# Altium PCB HeatMapNodeV1.PcbDoc
Units mil, origin at the board's own origin, x right, y up, seen from the top; angles counter-clockwise.
Board outline 1650 x 1800 mil, 4 copper layers (Top Layer, Internal Layer 1, Internal Layer 2, Bottom Layer), stack 30.668 mil thick; 33 components, 30 nets, 122 pads, 25 vias.
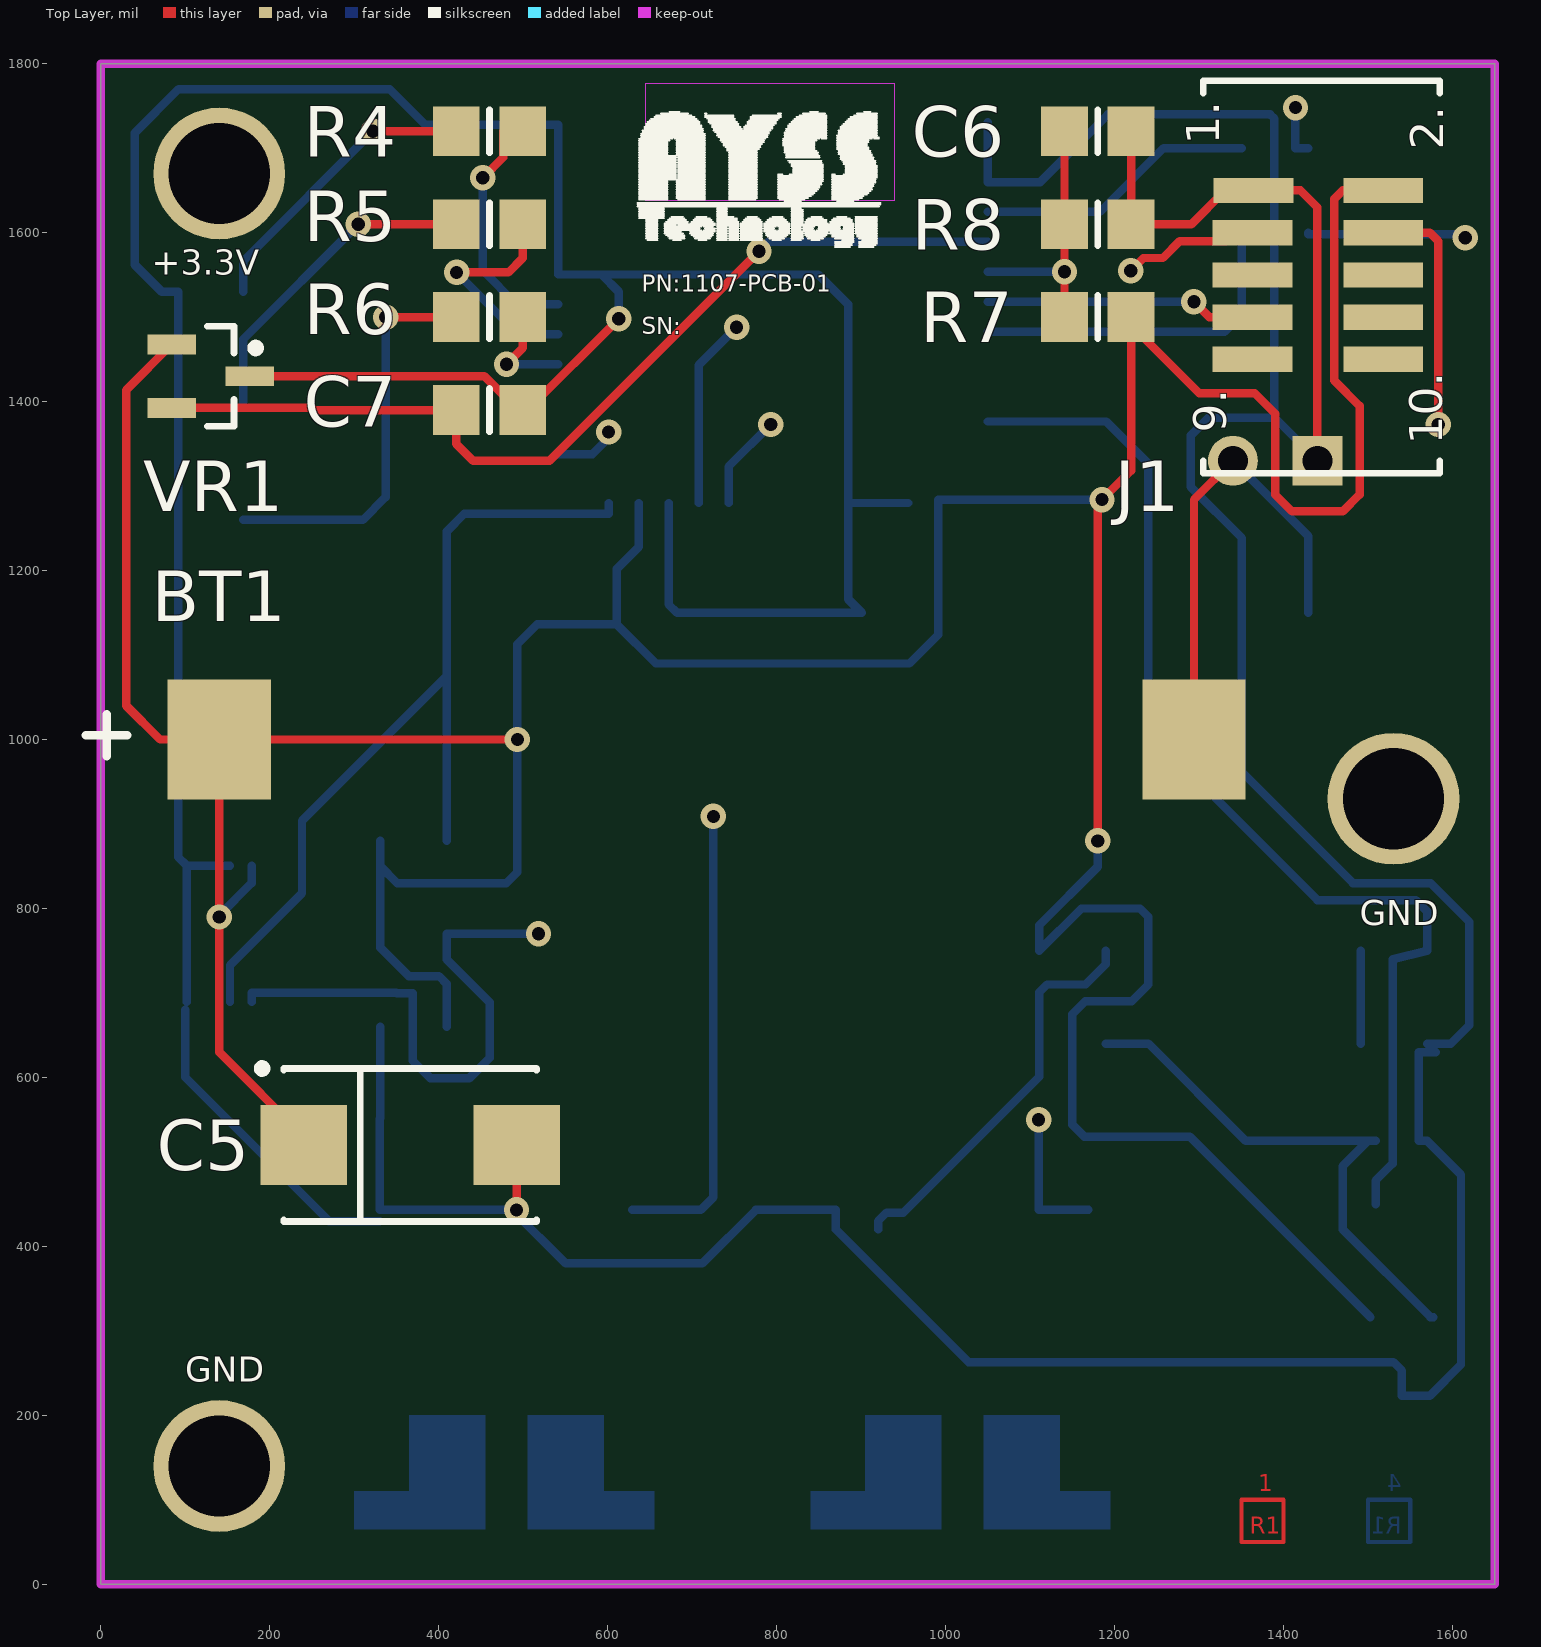
[diagram p0: Top Layer view]
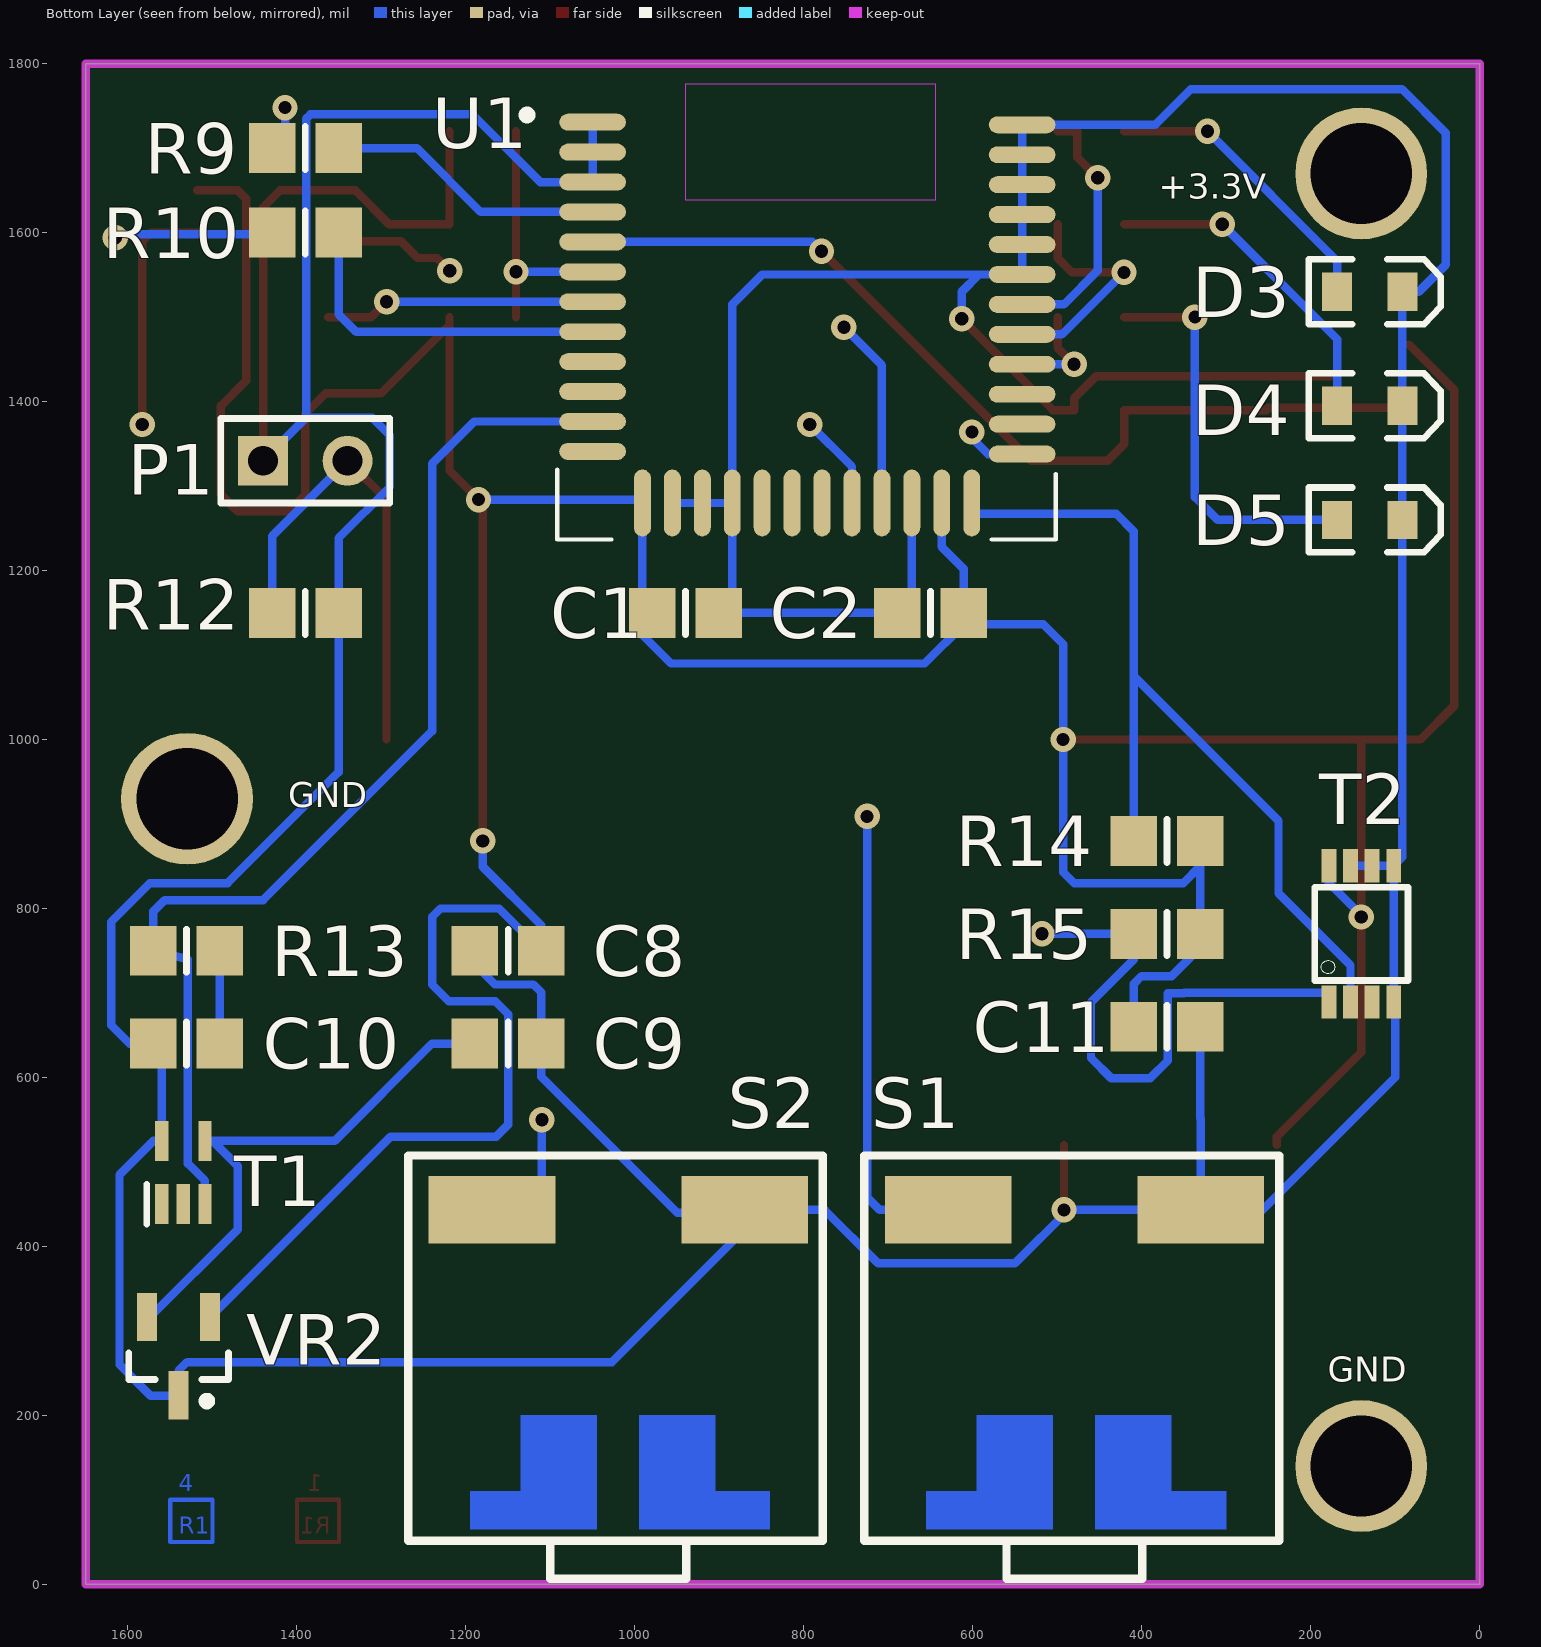
[diagram p1: Bottom Layer view, seen from below]
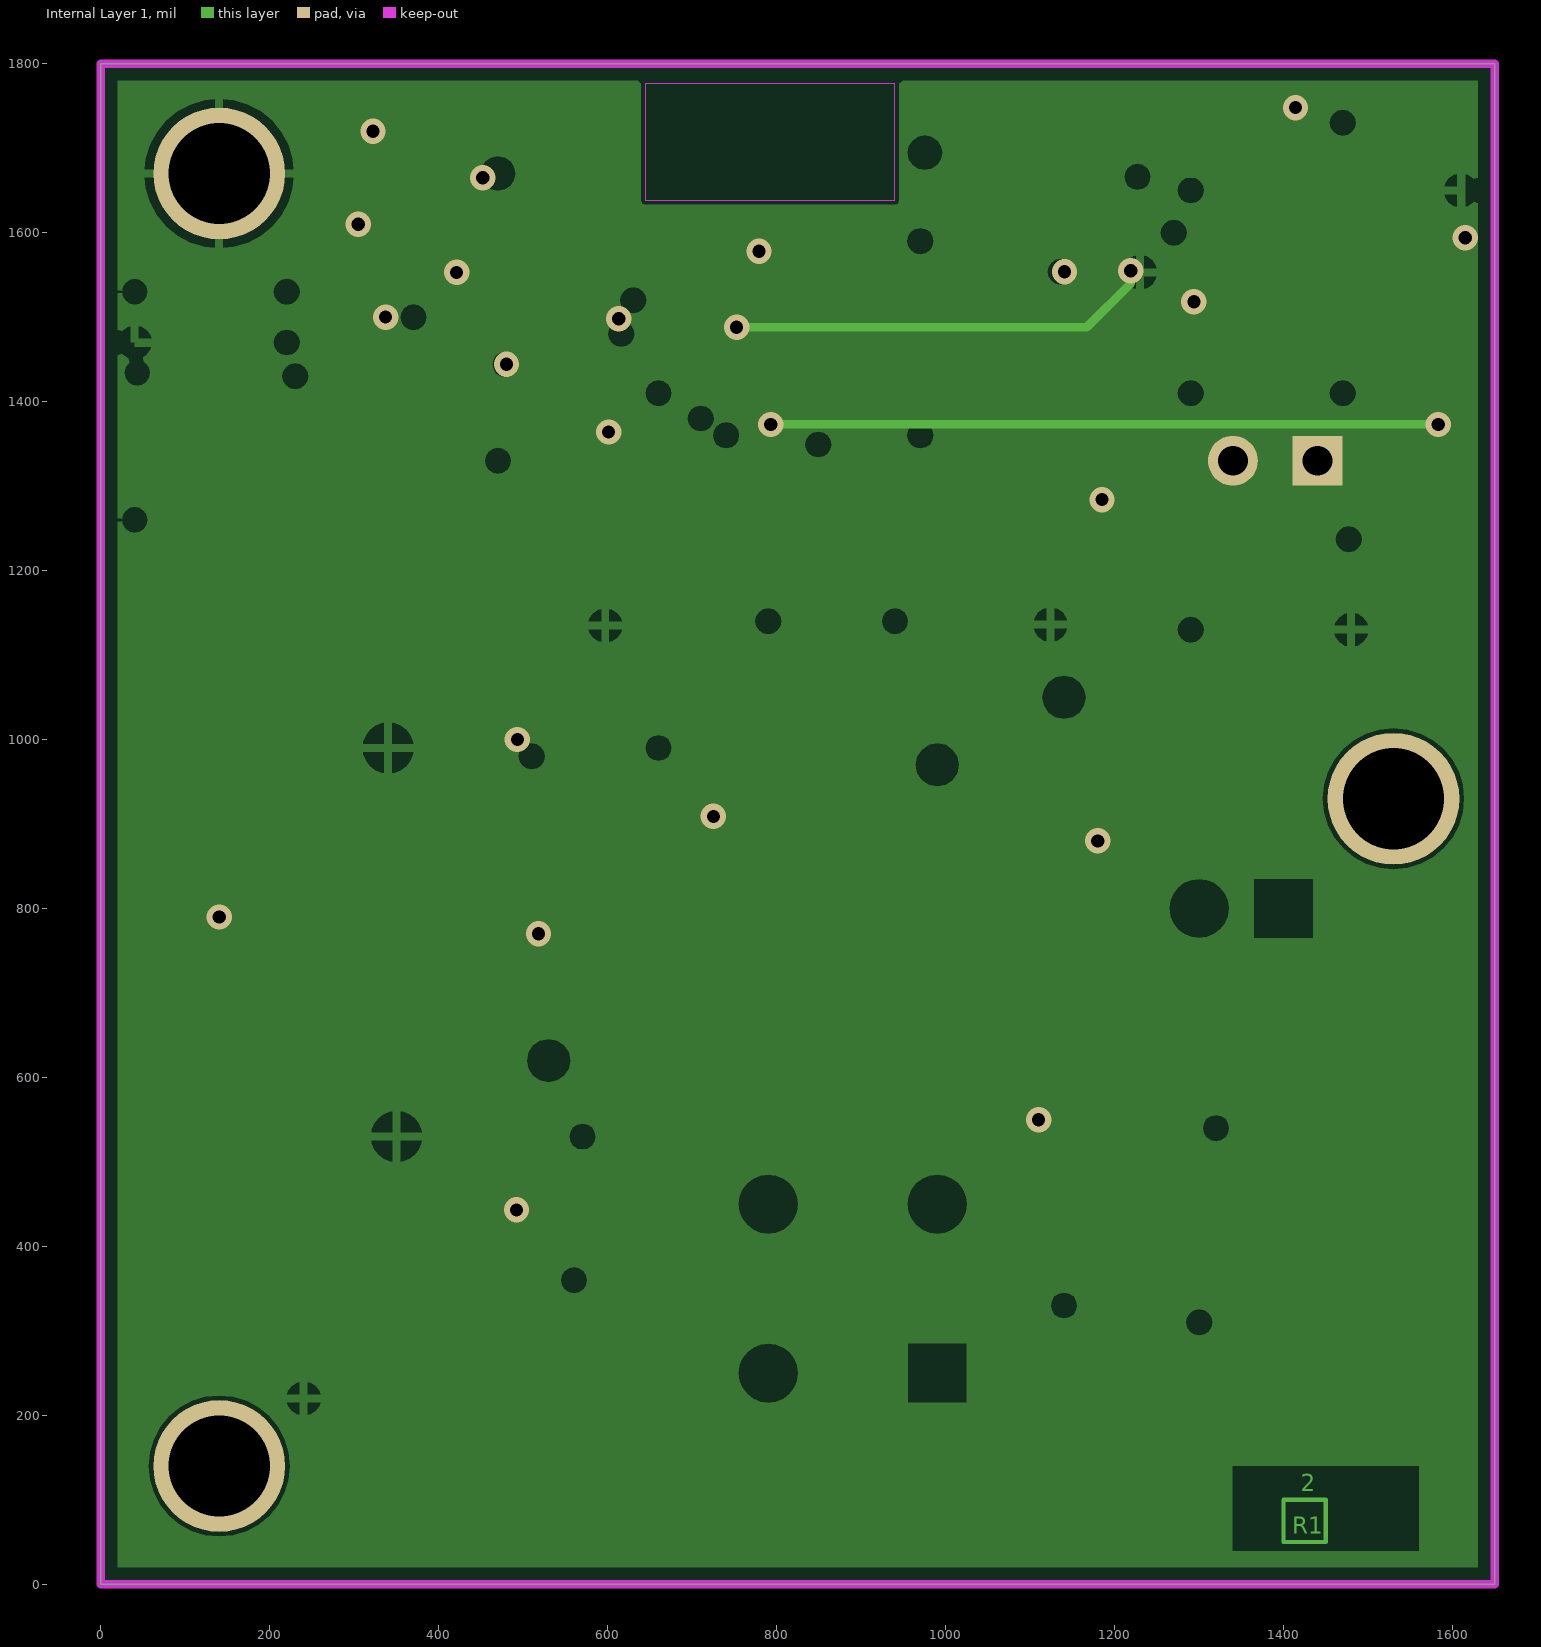
[diagram p2: Internal Layer 1]
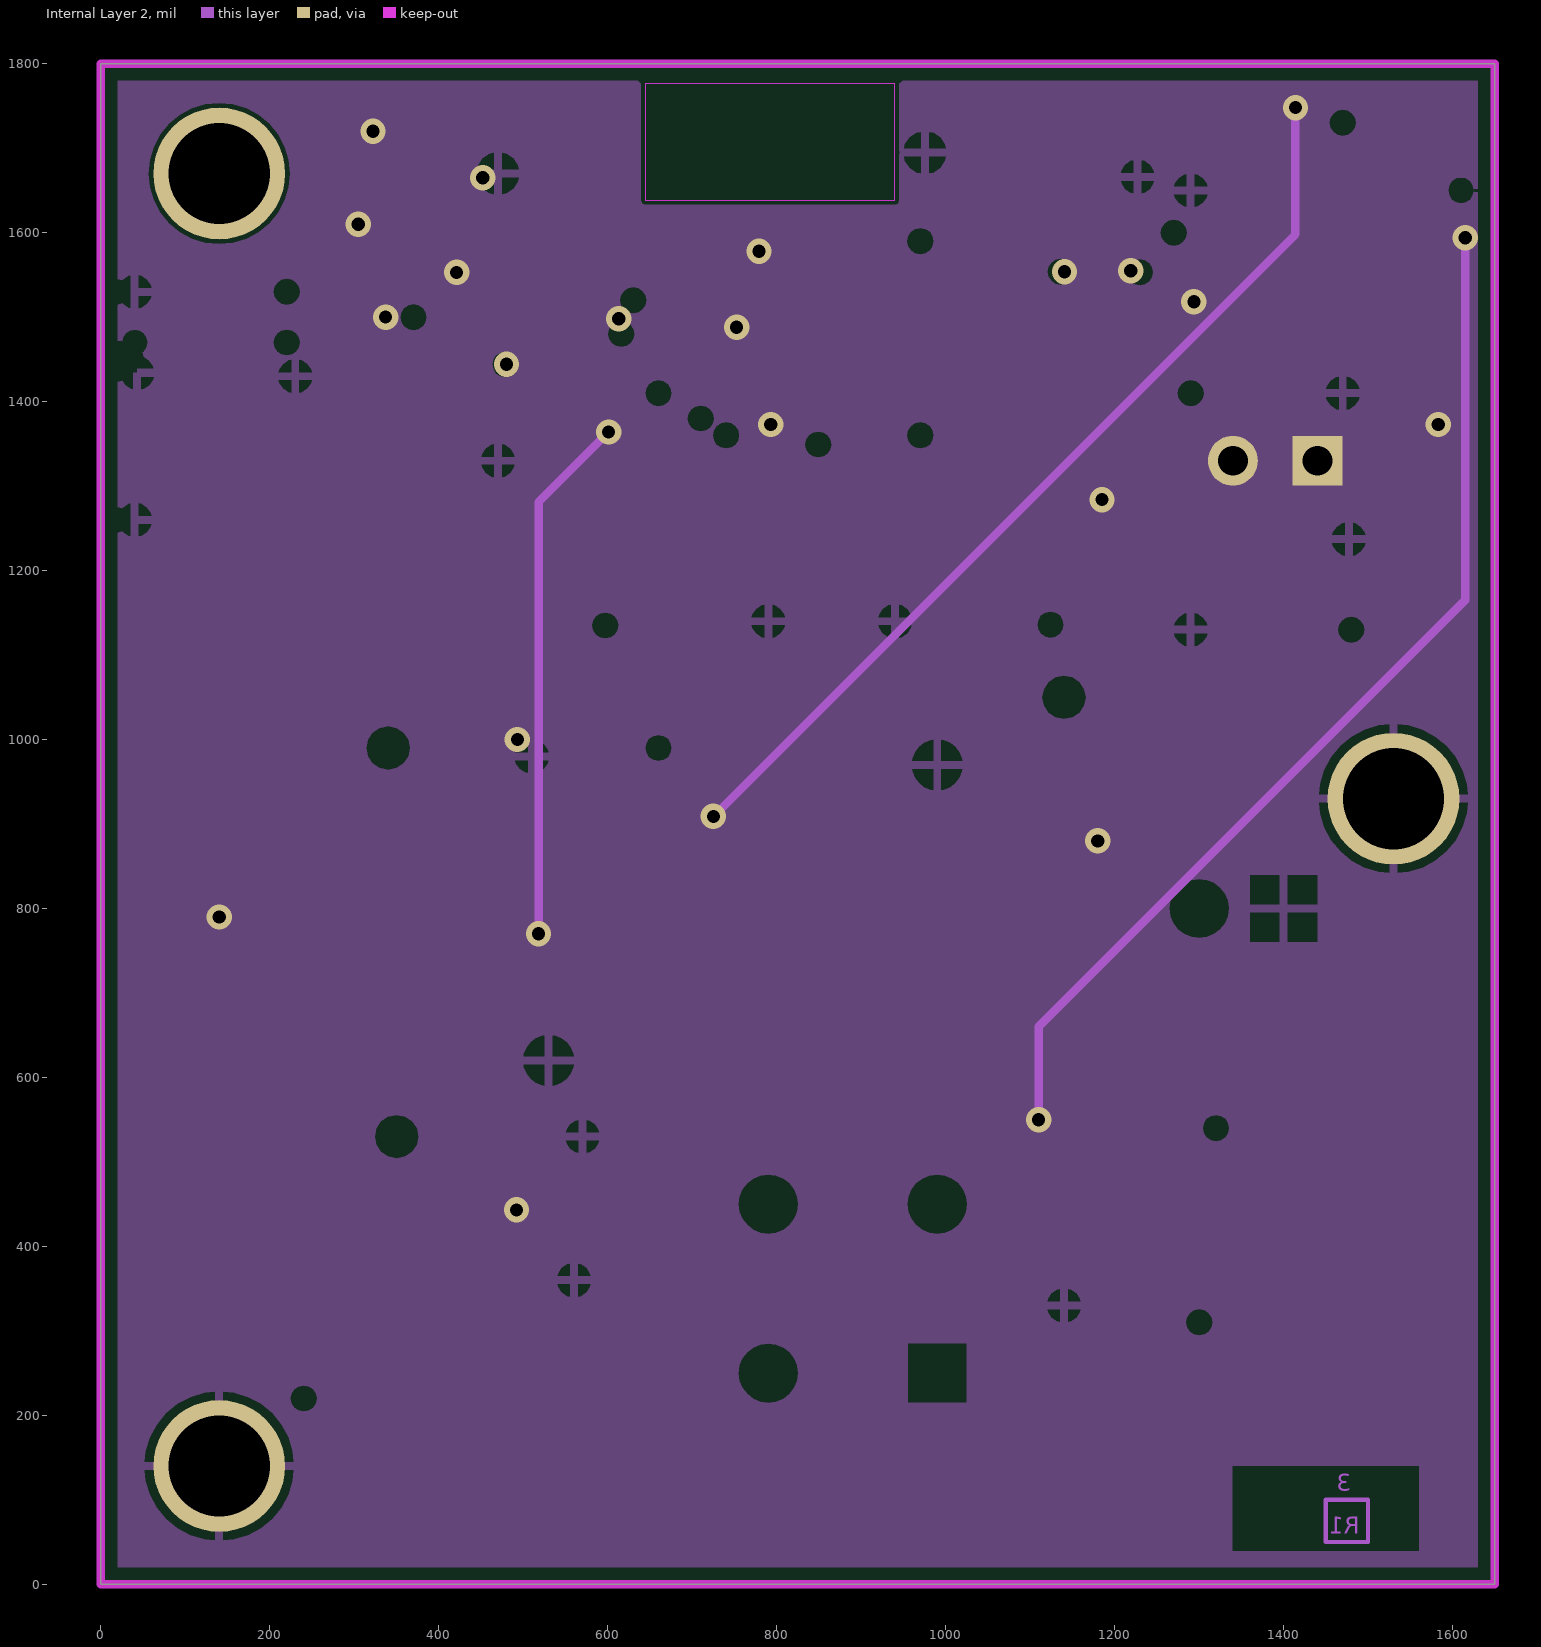
[diagram p3: Internal Layer 2]

## Layer stack, top to bottom
Top Solder: solder mask 0.4, Solder Resist, Dk 3.5
Top Layer: signal copper 1.417
Dielectric 1: core 10, FR-4, Dk 4.2
Internal Layer 1: signal copper 1.417
Dielectric 5: prepreg 5, Dk 4.2
Internal Layer 2: signal copper 1.417
Dielectric 4: core 10, Dk 4.2
Bottom Layer: signal copper 1.417
Bottom Solder: solder mask 0.4, Solder Resist, Dk 3.5

## Board outline
0,0 0,1800 1650,1800 1650,0

## Design rules (kind name [scope] priority, off if disabled: settings)
AssemblyTestPointUsage [(InNet('GND') OR InNet('VDD'))] p1 off: allowmultiple=TRUE
AssemblyTestpoint [All] p1 off: testpointundercomponent=TRUE minsize=40 maxsize=250 preferedsize=60 minholesize=0 maxholesize=150 preferedholesize=32 testpointgrid=1 usegrid=TRUE gridtolerance=0.01 allowsidetop=TRUE allowsidebottom=TRUE
Clearance [All] p1: gap=5 ignorepadtopadclearanceinfootprint=FALSE except(0: Arc-Hole Track-Hole SMDPad-Hole THPad-Hole Via-Hole Fill-Hole Poly-Hole Region-Hole Text-Hole)
DiffPairsRouting [All] p1: maxlimit=15 minlimit=5 mostfreqgap=10 toplayer_minwidth=5 toplayer_maxwidth=15 toplayer_prefwidth=10 midlayer1_minwidth=5 midlayer1_maxwidth=15 midlayer1_prefwidth=10 midlayer2_minwidth=5 midlayer2_maxwidth=15 midlayer2_prefwidth=10 bottomlayer_minwidth=5 bottomlayer_maxwidth=15 bottomlayer_prefwidth=10 maxuncoupledlength=500
FabricationTestPointUsage [(InNet('GND') OR InNet('VDD'))] p1: valid=0 allowmultiple=TRUE
FabricationTestpoint [All] p1: side=3 testpointundercomponent=TRUE minsize=40 maxsize=250 preferedsize=100 minholesize=0 maxholesize=250 preferedholesize=32 testpointgrid=1 allowsidetop=TRUE allowsidebottom=TRUE usegrid=TRUE gridtolerance=0.01
HoleSize [All] p1: absolutevalues=TRUE maxlimit=1000 minlimit=10 maxpercent=80.000 minpercent=20.000
MinimumSolderMaskSliver [All] p1: minsoldermaskwidth=5
PolygonConnect [All] p1: connectstyle=Relief reliefconductorwidth=10 reliefentries=4 polygonreliefangle="90 Angle" airgapwidth=10
RoomDefinition HeatMapNodeV1 [InComponentClass('HeatMapNodeV1')] p1: confinementstyle=ConfineIn formatcopy=TRUE lockcomponents=FALSE outline 1690,60 3670,60 3670,380 1690,380
RoutingVias [All] p1: holewidth=15.6 width=30 viastyle="Through Hole" minholewidth=10 minwidth=20 maxholewidth=31.3 maxwidth=50
SilkToSolderMaskClearance [IsPad] p1: minsilkscreentomaskgap=5 clearancetoexposedcopper=TRUE
SolderMaskExpansion "Via solder mask" [IsVia] p1: expansion=-100 // Solder mask for the vias
SolderMaskExpansion [All] p2: expansion=4
Width [All] p1: maxlimit=20 minlimit=5 preferedwidth=10
22 further rules are at their usual default settings.

## Components (designator, comment, footprint, x,y, rotation, side; value= is the part's Value field where it differs from the comment)
BT1 "1060" 1060 716.97,1000 r180 top
C1 "Cap Semi" 6-0805_M 940,1150 r0 bottom value=0.10µF
C2 "Cap Semi" 6-0805_M 650,1150 r180 bottom value=0.10µF
C5 "Cap Pol3" D 365.98,520 r0 top value=100µF
C6 "Cap Semi" 6-0805_M 1180,1720 r180 top value=0.10µF
C7 "Cap Semi" 6-0805_M 460,1390 r180 top value=0.10µF
C8 "Cap Semi" 6-0805_M 1150,750 r180 bottom value=0.10µF
C9 "Cap Semi" 6-0805_M 1150,640 r0 bottom value=0.10µF
C10 "Cap Semi" 6-0805_M 1530.63,640 r180 bottom value=1µF
C11 "Cap Semi" 6-0805_M 370,660 r0 bottom value=0.01µF
D3 "LED2" 2.0X1.25X1.2 130,1530 r180 bottom
D4 "LED2" 2.0X1.25X1.2 130,1395 r180 bottom
D5 "LED2" 2.0X1.25X1.2 130,1260 r180 bottom
J1 "Header 5X2" HDR2X5_SMD_127 1440,1550 r90 top
P1 "Header 2" HDR1X2 1440,1330 r180 bottom
R4 "Res1" 6-0805_M 460,1720 r180 top value=680
R5 "Res1" 6-0805_M 460,1610 r180 top value=680
R6 "Res1" 6-0805_M 460,1500 r180 top value=680
R7 "Res1" 6-0805_M 1180,1500 r0 top value=10K
R8 "Res1" 6-0805_M 1180,1610 r180 top value=10K
R9 "Res1" 6-0805_M 1390,1700 r0 bottom value=680
R10 "Res1" 6-0805_M 1390,1600 r0 bottom value=680
R12 "Res1" 6-0805_M 1390,1150 r180 bottom value=1k
R13 "Res1" 6-0805_M 1530.63,750 r180 bottom value=200
R14 "Res1" 6-0805_M 370,880 r0 bottom value=10K
R15 "Res1" 6-0805_M 370,770 r0 bottom value=10K
S1 "SW-PB" SA2 480,270 r0 bottom
S2 "SW-PB" SA2 1020,270 r0 bottom
T1 "STLM20W87F" SOT65P210X110-5N 1534.41,487.4 r90 bottom
T2 "TMP75" MSOP8 140,770 r180 bottom
U1 "BLE121LR module" BLE121LR 1050,1280 r180 bottom
VR1 "Volt Reg" SOT23_M 130,1430 r0 top
VR2 "Volt Reg" SOT23_M 1540,270 r270 bottom

## Footprints (in the part's own frame and the unit in brackets; to place one, negate y for a bottom-side part, rotate by r counter-clockwise, add the part's x,y. Pads: shape width x height; smd on the part's side, far side on the other; paste and mask are expansions set on the pad)
2.0X1.25X1.2 [mm] "SM LED; 2 Flat Leads"
  rect 0.9x1.15 smd: 1(-0.98,0) 2(0.98,0)
  silkscreen extent -1.83,-0.97 2.13,0.98
6-0805_M [mm] "Chip Resistor, Body 2.0x1.2mm, IPC Low Density"
  rect 1.4x1.5 smd: 1(-1,0) 2(1,0)
  silkscreen extent 0,-0.65 0,0.65, body extent -1.07,-0.7 1.07,0.7, height 0.7
1060 [mm] "SMT HOLDER FOR 2032 CELL T&R"
  rect 3.108x3.61 smd: 1(-14.655,0) 2(14.655,0)
  silkscreen extent 17.42,-0.76 18.67,0.51, body extent -15.91,-8.06 15.92,7.94, height 6.02
BLE121LR [mil]
  oval 79x20 smd: 1(0,450.79) 2(0,415.35) 3(0,379.92) 4(0,344.49) 5(0,309.05) 6(0,273.62) 7(0,238.19) 8(0,202.76) 9(0,167.32) 10(0,131.89) 11(0,96.46) 12(0,61.02) 25(508.44,57.89) 26(508.44,93.33) 27(508.44,128.76) 28(508.44,164.19) 29(508.44,199.63) 30(508.44,235.06) 31(508.44,270.49) 32(508.44,305.92) 33(508.44,341.36) 34(508.44,376.79) 35(508.44,412.22) 36(508.44,447.66)
  oval 20x79 smd: 13(59.06,0) 14(94.49,0) 15(129.92,0) 16(165.35,0) 17(200.79,0) 18(236.22,0) 19(271.65,0) 20(307.09,0) 21(342.52,0) 22(377.95,0) 23(413.39,0) 24(448.82,0)
  Multi-Layer keep-out region: 110.24,496.06 405.51,496.06 405.51,358.26 110.24,358.26
  silkscreen extent -83,-43 548,464, body extent -30,-31 539,500, height 71
D [mm] "Capacitor, SM Tantalum; Body 7.3 x 4.3 mm (LxW typ)"
  rect 2.6x2.4 smd: 1(-3.2,0) 2(3.2,0)
  silkscreen extent -4.57,-2.3 3.8,2.42
HDR1X2 [mm] "Connector; Header; 2 Position"
  rect 1.5x1.5 hole 0.9: 1(0,0)
  round 1.5 hole 0.9: 2(2.54,0)
  silkscreen extent -1.27,-1.27 3.81,1.27
HDR2X5_SMD_127 [mm] "10 Positions Header, Shrouded Connector 0.050\" (1.27mm) Surface Mount Gold"
  rect 0.76x2.4 smd: 1(2.54,1.919) 2(2.54,-1.981) 3(1.27,1.956) 4(1.27,-1.981) 5(0,1.956) 6(0,-1.981) 7(-1.27,1.956) 8(-1.27,-1.981) 9(-2.54,1.956) 10(-2.54,-1.981)
  silkscreen extent -5.97,-3.68 5.84,3.43, body extent -5.46,-2.41 5.44,2.54, height 5.4
MSOP8 [mm]
  rect 0.45x1 smd: 1(-0.975,-2.05) 2(-0.325,-2.05) 3(0.325,-2.05) 4(0.975,-2.05) 5(0.975,2.05) 6(0.325,2.05) 7(-0.325,2.05) 8(-0.975,2.05)
  silkscreen extent -1.4,-1.4 1.4,1.4
SA2 [mm] "Right angle, surface mount, pushbutton switch"
  rect 3.81x2.03 smd: 1(-3.81,-4.4) 2(3.785,-4.4)
  Top Layer region: -4.572,5.207 -4.572,4.064 -2.921,4.064 -2.921,1.778 -0.635,1.778 -0.635,5.207
  Top Layer region: 0.635,5.207 4.445,5.207 4.445,4.064 2.921,4.064 2.921,1.778 0.635,1.778
  silkscreen extent -6.16,-6.04 6.31,6.69, body extent -5.08,-5.08 5.08,9.07, height 6.2
SOT23_M [mm] "SOT23, 3-Leads, Body 2.9x1.3mm, Pitch 0.95mm, Lead Span 2.3mm - Reverse Pinning, IPC Low Density"
  rect 1.45x0.6 smd: 1(1.175,0) 2(-1.175,-0.95) 3(-1.175,0.95)
  silkscreen extent -0.1,-1.5 1.48,1.5, body extent -0.7,-1.5 0.7,1.5, height 1.1
SOT65P210X110-5N [mm]
  rect 1.2x0.4 smd: 1(-0.95,0.65) 2(-0.95,0) 3(-0.95,-0.65) 4(0.95,-0.65) 5(0.95,0.65)
  silkscreen extent -1.55,1.1 -0.35,1.1

## Part data
BT1: library part Battery, "Coin Cell Battery 2032 Holder", Manufacturer="Keystone Electronics", Operating Temperature="-50°C ~ 145°C", Supplier Part Number 1=36-1060-ND, Battery Cell Size="Coin, 20.0mm", Battery Series=2032, Battery Type, Function="Coin Cell, Holder", Category="Battery Products", ComponentLink1Description=http://www.keyelco.com/product-pdf.cfm?p=726, ComponentLink1URL=http://www.keyelco.com/product-pdf.cfm?p=726, Height Above Board="0.217\" (5.50mm)", Manufacturer Part Number=1060, Mounting Type="PCB, Surface Mount", Number of Cells=1, Part Status=Active, Pricing 1="1=1.79, 10=1.475, 50=1.3244, 100=1.2642, 250=1.1438, 500=1.0535, 1000=1.01202, 2500=0.903, 5000=0.80066 (USD)", RoHS="RoHS Compliant", Stock 1=5034, Style="Holder (Open)", Supplier 1=Digi-Key, Termination Style="SMD (SMT) Tab"
C1 C2 C6 C7 C8 C9 C10 C11: "Capacitor (Semiconductor SIM Model)", Capacitance=0.10µF, Manufacturer="Taiyo Yuden", Manufacturer Part Number=HMK212B7104KG-T, Operating Temperature="-55°C ~ 125°C", Package / Case="0805 (2012 Metric)", Ratings=-, Supplier Part Number 1=587-1276-1-ND, Temperature Coefficient=X7R, Tolerance=±10%, Voltage - Rated=100V, Applications="General Purpose", Category=Capacitors, ComponentLink1Description=http://ds.yuden.co.jp/TYCOMPAS/ut/detail.do?productNo=HMK212B7104KG-T&fileName=HMK212B7104KG-T_SS&mode=specSheetDownload, ComponentLink1URL=http://ds.yuden.co.jp/TYCOMPAS/ut/detail.do?productNo=HMK212B7104KG-T&fileName=HMK212B7104KG-T_SS&mode=specSheetDownload, Features="High Voltage", Height - Seated (Max)=-, LatestRevisionDate=29-May-2009, LatestRevisionNote="IPC-7351 Footprint Added.", Lead Spacing=-, Lead Style=-, Mounting Type="Surface Mount, MLCC", PackageDescription="Chip Capacitor", Packaging="Cut Tape (CT)", Part Status=Active, Pricing 1="1=0.19, 10=0.128, 25=0.0936, 50=0.0766, 100=0.0647, 250=0.05276, 500=0.04426, 1000=0.03915 (USD)", Published=8-Jun-2000, Publisher="Altium Limited", RoHS="RoHS Compliant", Size / Dimension="0.079\" L x 0.049\" W (2.00mm x 1.25mm)", Stock 1=4553, Supplier 1=Digi-Key, Thickness (Max)="0.053\" (1.35mm)"
C5: "Polarized Capacitor (Surface Mount)", Capacitance=100µF, ESR (Equivalent Series Resistance)="125 mOhm", Lifetime @ Temp.="2000 Hrs @ 85°C", Manufacturer=KEMET, Manufacturer Part Number=T495D107K016ATE125, Manufacturer Size Code=D, Operating Temperature="-55°C ~ 125°C", Package / Case="2917 (7343 Metric)", Supplier Part Number 1=399-8499-1-ND, Tolerance=±10%, Voltage - Rated=16V, Category=Capacitors, ComponentLink1Description=http://www.kemet.com/docfinder?Partnumber=T495D107K016ATE125, ComponentLink1URL=http://www.kemet.com/docfinder?Partnumber=T495D107K016ATE125, Failure Rate=-, Features="General Purpose", Height - Seated (Max)="0.122\" (3.10mm)", LatestRevisionDate=29-May-2009, LatestRevisionNote="IPC-7351 Footprint Added.", Lead Spacing=-, Mounting Type="Surface Mount", PackageDescription="Chip Capacitor", PackageReference=C0805, Packaging="Cut Tape (CT)", Part Status=Active, Pricing 1="1=1.37, 10=1.084, 25=0.9936, 50=0.9394, 100=0.8129, 250=0.72264 (USD)", Published=8-Jun-2000, Publisher="Altium Limited", RoHS="RoHS Compliant", Size / Dimension="0.287\" L x 0.169\" W (7.30mm x 4.30mm)", Stock 1=19470, Supplier 1=Digi-Key, Type=Molded
D3: "Typical RED, GREEN, YELLOW, AMBER GaAs LED", Color=Green, Current - Test=20mA, Manufacturer="Visual Communications Company - VCC", Manufacturer Part Number=CMD17-21VGD/TR8, Millicandela Rating=7mcd, Package / Case="0805 (2012 Metric)", Supplier Device Package=0805, Supplier Part Number 1=L62505CT-ND, Voltage - Forward (Vf) (Typ)=2.1V, Category=Optoelectronics, ComponentLink1Description=http://vcclite.com/_pdf/CMD17-21%20Series%20SMT%20LEDs%200805%20Package%20Size.pdf, ComponentLink1URL=http://vcclite.com/_pdf/CMD17-21%20Series%20SMT%20LEDs%200805%20Package%20Size.pdf, Features=-, Height (Max)=1.20mm, Lens Color=Green, Lens Style/Size="Rectangle with Flat Top, 1.40mm x 1.25mm", Lens Transparency=Diffused, Mounting Type="Surface Mount", Packaging="Cut Tape (CT)", Part Status=Active, Pricing 1="1=0.5, 10=0.364, 25=0.2972, 100=0.2376, 250=0.20048, 500=0.17078, 1000=0.13365 (USD)", RoHS="RoHS Compliant", Size / Dimension="2.00mm L x 1.25mm W", Stock 1=21325, Supplier 1=Digi-Key, Viewing Angle=140°, Wavelength - Dominant=-, Wavelength - Peak=570nm
D4: "Typical RED, GREEN, YELLOW, AMBER GaAs LED", Color=Red, Current - Test=20mA, Manufacturer="Visual Communications Company - VCC", Manufacturer Part Number=CMD17-21VRD/TR8, Millicandela Rating=6mcd, Package / Case="0805 (2012 Metric)", Supplier Device Package=0805, Supplier Part Number 1=L62501CT-ND, Voltage - Forward (Vf) (Typ)=2V, Category=Optoelectronics, ComponentLink1Description=http://vcclite.com/_pdf/CMD17-21%20Series%20SMT%20LEDs%200805%20Package%20Size.pdf, ComponentLink1URL=http://vcclite.com/_pdf/CMD17-21%20Series%20SMT%20LEDs%200805%20Package%20Size.pdf, Features=-, Height (Max)=1.20mm, Lens Color=Red, Lens Style/Size="Rectangle with Flat Top, 1.40mm x 1.25mm", Lens Transparency=Diffused, Mounting Type="Surface Mount", Packaging="Cut Tape (CT)", Part Status=Active, Pricing 1="1=0.54, 10=0.388, 25=0.3168, 100=0.2534, 250=0.21384, 500=0.18216, 1000=0.14256 (USD)", RoHS="RoHS Compliant", Size / Dimension="2.00mm L x 1.25mm W", Stock 1=24797, Supplier 1=Digi-Key, Viewing Angle=140°, Wavelength - Dominant=-, Wavelength - Peak=640nm
D5: "Typical RED, GREEN, YELLOW, AMBER GaAs LED", Color=Yellow, Current - Test=20mA, Manufacturer="Visual Communications Company - VCC", Manufacturer Part Number=CMD17-21VYD/TR8, Millicandela Rating=4mcd, Package / Case="0805 (2012 Metric)", Supplier Device Package=0805, Supplier Part Number 1=L62507CT-ND, Voltage - Forward (Vf) (Typ)=2V, Category=Optoelectronics, ComponentLink1Description=http://vcclite.com/_pdf/CMD17-21%20Series%20SMT%20LEDs%200805%20Package%20Size.pdf, ComponentLink1URL=http://vcclite.com/_pdf/CMD17-21%20Series%20SMT%20LEDs%200805%20Package%20Size.pdf, Features=-, Height (Max)=1.20mm, Lens Color=Yellow, Lens Style/Size="Rectangle with Flat Top, 1.40mm x 1.25mm", Lens Transparency=Diffused, Mounting Type="Surface Mount", Packaging="Cut Tape (CT)", Part Status=Active, Pricing 1="1=0.61, 10=0.437, 25=0.3564, 100=0.2851, 250=0.24056, 500=0.20494, 1000=0.16038 (USD)", RoHS="RoHS Compliant", Size / Dimension="2.00mm L x 1.25mm W", Stock 1=10342, Supplier 1=Digi-Key, Viewing Angle=140°, Wavelength - Dominant=-, Wavelength - Peak=585nm
J1: "Header, 5-Pin, Dual row", Color=Black, Manufacturer="Amphenol FCI", Manufacturer Part Number=20021521-00010T1LF, Supplier Part Number 1=609-4054-ND, Category="Connectors, Interconnects", ComponentLink1Description=http://portal.fciconnect.com/Comergent//fci/drawing/20021521.pdf, ComponentLink1URL=http://portal.fciconnect.com/Comergent//fci/drawing/20021521.pdf, Connector Type="Header, Shrouded", Contact Finish=Gold, Contact Finish Thickness=Flash, Contact Mating Length=-, Contact Type="Male Pin", Fastening Type=-, Features=-, LatestRevisionDate=17-Jul-2002, LatestRevisionNote="Re-released for DXP Platform.", Mounting Type="Surface Mount", Number of Positions=10, Number of Positions Loaded=All, Number of Rows=2, Packaging=Tube, Part Status=Active, Pitch="0.050\" (1.27mm)", Pricing 1="1=1.11, 10=0.973, 100=0.8393, 500=0.6867, 1000=0.6104, 5000=0.5341, 10000=0.5074 (USD)", Publisher="Altium Limited", RoHS="RoHS Compliant", Row Spacing="0.050\" (1.27mm)", Stock 1=34633, Supplier 1=Digi-Key, Termination=Solder
P1: "Header, 2-Pin"
R4 R5 R6 R9 R10 R13 R14 R15: "Resistor", Manufacturer="Vishay Dale", Manufacturer Part Number=CRCW0805680RFKEA, Operating Temperature="-55°C ~ 155°C", Package / Case="0805 (2012 Metric)", Power (Watts)="0.125W, 1/8W", Resistance (Ohms)=680, Supplier Device Package=0805, Supplier Part Number 1=541-680CCT-ND, Temperature Coefficient=±100ppm/°C, Tolerance=±1%, Category=Resistors, ComponentLink1Description=http://www.vishay.com/docs/20035/dcrcwe3.pdf, ComponentLink1URL=http://www.vishay.com/docs/20035/dcrcwe3.pdf, Composition="Thick Film", Failure Rate=-, Features="Automotive AEC-Q200", Height - Seated (Max)="0.020\" (0.50mm)", Number of Terminations=2, Packaging="Cut Tape (CT)", Part Status=Active, Pricing 1="1=0.1, 10=0.04, 25=0.0288, 50=0.022, 100=0.0162, 250=0.01236, 500=0.0099, 1000=0.00729 (USD)", RoHS="RoHS Compliant", Size / Dimension="0.079\" L x 0.049\" W (2.00mm x 1.25mm)", Stock 1=37773, Supplier 1=Digi-Key
R7 R8: "Resistor", Manufacturer="Vishay Dale", Manufacturer Part Number=CRCW080510K0FKEA, Operating Temperature="-55°C ~ 155°C", Package / Case="0805 (2012 Metric)", Power (Watts)="0.125W, 1/8W", Resistance (Ohms)=10k, Supplier Device Package=0805, Supplier Part Number 1=541-10.0KCCT-ND, Temperature Coefficient=±100ppm/°C, Tolerance=±1%, Category=Resistors, ComponentLink1Description=http://www.vishay.com/docs/20035/dcrcwe3.pdf, ComponentLink1URL=http://www.vishay.com/docs/20035/dcrcwe3.pdf, Composition="Thick Film", Failure Rate=-, Features="Automotive AEC-Q200", Height - Seated (Max)="0.020\" (0.50mm)", Number of Terminations=2, Packaging="Cut Tape (CT)", Part Status=Active, Pricing 1="1=0.1, 10=0.04, 25=0.0288, 50=0.022, 100=0.0162, 250=0.01236, 500=0.0099, 1000=0.00729 (USD)", RoHS="RoHS Compliant", Size / Dimension="0.079\" L x 0.049\" W (2.00mm x 1.25mm)", Stock 1=531677, Supplier 1=Digi-Key
R12: "Resistor", Manufacturer="Vishay Dale", Manufacturer Part Number=CRCW08050000Z0EA, Operating Temperature="-55°C ~ 155°C", Package / Case="0805 (2012 Metric)", Power (Watts)="0.125W, 1/8W", Resistance (Ohms)=0.0, Supplier Device Package=0805, Supplier Part Number 1=541-0.0ACT-ND, Temperature Coefficient=-, Tolerance=Jumper, Category=Resistors, ComponentLink1Description=http://www.vishay.com/docs/20035/dcrcwe3.pdf, ComponentLink1URL=http://www.vishay.com/docs/20035/dcrcwe3.pdf, Composition="Thick Film", Failure Rate=-, Features="Automotive AEC-Q200", Height - Seated (Max)="0.020\" (0.50mm)", Packaging="Cut Tape (CT)", Part Status=Active, Pricing 1="1=0.1, 10=0.026, 25=0.0184, 50=0.014, 100=0.0104, 250=0.00792, 500=0.00634, 1000=0.00466 (USD)", RoHS="RoHS Compliant", Size / Dimension="0.079\" L x 0.049\" W (2.00mm x 1.25mm)", Stock 1=1246099, Supplier 1=Digi-Key
S1 S2: "Switch", Color - Actuator/Cap=White, Current Rating="0.4VA (AC/DC)", Illumination Type, Color=-, Manufacturer=C&K, Manufacturer Part Number=EP11FPD1SAPE(T&R), Operating Temperature="-30°C ~ 85°C", Supplier Part Number 1=CKN9051CT-ND, Voltage Rating - AC=20V, Actuator Type="Round, Plunger, Flush", Category=Switches, Circuit=SPST-NO, ComponentLink1Description=http://www.ckswitches.com/media/1408/ep.pdf, ComponentLink1URL=http://www.ckswitches.com/media/1408/ep.pdf, Electrical Life="60,000 Cycles", Features="Epoxy Sealed Terminals", Illumination Voltage (Nominal)=-, Ingress Protection="IP57 - Dust Protected, Waterproof", Mechanical Life=-, Mounting Type="Surface Mount, Right Angle", Packaging="Cut Tape (CT)", Panel Cutout Dimensions=-, Part Status=Active, Pricing 1="1=5, 10=4.759, 25=4.5208, 50=4.4018, 100=4.2827, 250=4.0448 (USD)", RoHS="RoHS Compliant", Stock 1=2128, Supplier 1=Digi-Key, Switch Function=Off-Mom, Termination Style="Gull Wing", Type=Standard, Voltage Rating - DC=20V
T1: "STLM20W87F, Temperature Sensor 1.5C 2.4 to 5.5V 5-Pin SOT-323", Manufacturer_Name=STMicroelectronics, RS Part Number=1685835, Allied_Number=70390883, Allied Price/Stock=http://www.alliedelec.com/stmicroelectronics-stlm20w87f/70390883/, Arrow Part Number=STLM20W87F, Arrow Price/Stock=https://www.arrow.com/en/products/stlm20w87f/stmicroelectronics, Datasheet Link=http://www.st.com/st-web-ui/static/active/en/resource/technical/document/datasheet/CD00119601.pdf, Geometry.Height=1.1mm, Manufacturer_Part_Number=STLM20W87F, RS Price/Stock=http://uk.rs-online.com/web/p/products/1685835
T2: "the tmp175 and tmp75 are two-wire serial output temperature sensors available in so-8 and msop-8 packages. requiring ...", Package=None, Availability=Unavailable, MF="Texas Instruments", MP=TMP75, Price=None, SnapEDA_Link=https://www.snapeda.com/parts/TMP75/Texas%2520Instruments/view-part/?ref=snap
U1: library part BLE121LR, "Bluetooth Low Energy (BLE) module", Current - Receiving="28mA ~ 33mA", Current - Transmitting="25mA ~ 39mA", Frequency=2.4GHz, Manufacturer="Silicon Labs", Manufacturer Part Number=BLE121LR-A-M256K, Operating Temperature="-40°C ~ 85°C", Package / Case=Module, Power - Output=8dBm, Supplier Part Number 1=1446-1039-1-ND, Voltage - Supply="2 V ~ 3.6 V", Antenna Type="Integrated, Chip", Category="RF/IF and RFID", ComponentLink1Description=http://media.digikey.com/pdf/Data%20Sheets/BlueGiga%20PDFs/BLE121LR_V1.2.pdf, ComponentLink1URL=http://media.digikey.com/pdf/Data%20Sheets/BlueGiga%20PDFs/BLE121LR_V1.2.pdf, Data Rate=2Mbps, Memory Size="256kB Flash,  8kB SRAM", Modulation=-, Mounting Type="Surface Mount", Packaging="Cut Tape (CT)", Part Status=Active, Pricing 1="1=13.65, 10=12.346, 25=11.3712, 100=10.3965, 250=9.74672, 500=9.09692 (USD)", Protocol="Bluetooth v4.0", RF Family/Standard=Bluetooth, RoHS="RoHS Compliant", Sensitivity=-98dBm, Serial Interfaces="I²C, SPI, UART", Stock 1=4848, Supplier 1=Digi-Key
VR1: "Voltage Regulator", Current - Cathode=-, Current - Output=5mA, Current - Supply=8.5µA, Manufacturer="Texas Instruments", Manufacturer Part Number=REF3312AIDBZT, Operating Temperature="-40°C ~ 125°C (TA)", Package / Case="TO-236-3, SC-59, SOT-23-3", Supplier Device Package=SOT-23-3, Supplier Part Number 1=296-22635-1-ND, Temperature Coefficient=30ppm/°C, Tolerance=±0.15%, Voltage - Input="1.8 V ~ 5.5 V", Voltage - Output (Min/Fixed)=1.25V, Category="Integrated Circuits (ICs)", ComponentLink1Description=http://www.ti.com/lit/ds/symlink/ref3312.pdf, ComponentLink1URL=http://www.ti.com/lit/ds/symlink/ref3312.pdf, Mounting Type="Surface Mount", Noise - 0.1Hz to 10Hz=35µVp-p, Noise - 10Hz to 10kHz=-, Output Type=Fixed, Packaging="Cut Tape (CT)", Part Status=Active, Pricing 1="1=2.14, 10=1.922, 100=1.5418 (USD)", Reference Type=Series, RoHS="RoHS Compliant", Stock 1=5482, Supplier 1=Digi-Key, Voltage - Output (Max)=-
VR2: "Voltage Regulator", Current - Cathode=-, Current - Output=5mA, Current - Supply=8.5µA, Manufacturer="Texas Instruments", Manufacturer Part Number=REF3333AIDBZT, Operating Temperature="-40°C ~ 125°C (TA)", Package / Case="TO-236-3, SC-59, SOT-23-3", Supplier Device Package=SOT-23-3, Supplier Part Number 1=296-22635-1-ND, Temperature Coefficient=30ppm/°C, Tolerance=±0.15%, Voltage - Input="1.8 V ~ 5.5 V", Voltage - Output (Min/Fixed)=1.25V, Category="Integrated Circuits (ICs)", ComponentLink1Description=http://www.ti.com/lit/ds/symlink/ref3312.pdf, ComponentLink1URL=http://www.ti.com/lit/ds/symlink/ref3312.pdf, Mounting Type="Surface Mount", Noise - 0.1Hz to 10Hz=35µVp-p, Noise - 10Hz to 10kHz=-, Output Type=Fixed, Packaging="Cut Tape (CT)", Part Status=Active, Pricing 1="1=2.14, 10=1.922, 100=1.5418 (USD)", Reference Type=Series, RoHS="RoHS Compliant", Stock 1=5482, Supplier 1=Digi-Key, Voltage - Output (Max)=-

## Free pads (board coordinates)
  round 156 hole 120: 0(140,140) 0(140,1670) 0(1530,930)

## Via types
v1: diameter 30, hole 15.6, Top Layer to Bottom Layer, 25 vias

## Nets (pads, with @x,y where several pads share a name; then routed paths per layer and width w, separated by ;. In a path a pad name is that pad's centre, name@x,y a point inside that pad or via, vN(x,y) a via of type N, cw(c..) or ccw(c..) an arc to the next point about the centre after c; other vN are vias at no path point)
DCDC: U1.18
GND: C1.1 C2.1 C5.2 C6.1 C7.1 C8.1 C9.1 C10.1 C11.1 D3.2 D4.2 D5.2 J1.1 P1.1 R8.1 R12.2 S1.1 S2.1 T1.5 T2.4 T2.5 T2.6 T2.7 U1.1 U1.2 U1.3 U1.14 U1.15 U1.16 U1.22 U1.31 U1.32 U1.33 U1.34 U1.35 U1.36 VR1.1 VR2.1 | length 9197.2
  Top Layer w10: VR1.1 454,1430 480,1404 480,1390 C7.1 505,1390 v1(613,1498) ; v1(491.97,443.23) C5.2 ; C6.1 R8.1 1290.75,1610 1330.75,1650 J1.1 1420,1650 1440,1630 P1.1
  Bottom Layer w10: T2.4@100,680 100,600 270,430 S1.1@330,430 ; T2.4 T2.5 ; T2.7 T2.6 T2.5 ; C11.1 330.63,551.63 330,551 S1.1 v1@486.77,443.23 ; v1(491.97,443.23) v1@486.77,443.23 ; v1(613,1498) 613,1530 592.51,1550.49 ; U1.22 672.05,1160 682.05,1150 C2.1 C1.1 884.65,1165.98 U1.16 ; S2.1@920,420 920,430 930,440 950,440 1110.63,600.63 C9.1 1110.63,700.63 1120,710 1165.63,710 1189.37,733.74 C8.1 ; U1.14 U1.15 U1.16 ; U1.1 U1.2 U1.3 1111.92,1659.92 1192,1740 1384,1740 1389,1735 1389,1381 ; P1.1 1389,1381 ; T2.5 91.42,860.91 D5.2 D4.2 D3.2 72,1530 40,1562 40,1718 92,1770 341.66,1770 384,1727.66 U1.36 U1.35 U1.34 U1.33 U1.32 U1.31 592.51,1550.49 ; v1@486.77,443.23 550,380 712,380 775.23,443.23 S2.1 870,420 1027,263 1530,263 1540,253 VR2.1 1540,223 1573,223 1610,260 1610,484.81 1570,524.8 T1.5 1560,630 1580,630 C10.1 1598,640 1620,662 1620,784 1574,830 1482,830 1350.63,961.37 R12.2 1350.63,1238.37 1290,1299 1290,1360 1311,1381 1389,1381 ; 592.51,1550.49 849.15,1550.49 884.65,1515 U1.16
NetBT1_1: BT1.1 P1.2 R12.1 | length 566.1
  Top Layer w10: BT1.1 1293.94,1283.94 P1.2
  Bottom Layer w10: P1.2 1429.37,1240.63 R12.1
NetC9_2: C9.2 T1.4 VR2.2 | length 635.1
  Bottom Layer w10: C9.2 1240,640 1355,525 1500,525 ; T1.4 1508.82,525 1500,525 ; VR2.2 1573.74,316.26 1470,420 1470,495 1500,525
NetC10_2: C10.2 R13.2 | length 110
  Bottom Layer w10: C10.2 R13.2
NetD3_1: D3.1 R4.2 | length 352.2
  Top Layer w10: v1(322,1720) R4.2
  Bottom Layer w10: D3.1 168.58,1566.58 v1(322,1720)
NetD4_1: D4.1 R5.2 | length 387.4
  Top Layer w10: v1(304.58,1610) R5.2
  Bottom Layer w10: D4.1 168.58,1474 v1(304.58,1610)
NetD5_1: D5.1 R6.2 | length 476.2
  Top Layer w10: v1(337,1500) R6.2
  Bottom Layer w10: D5.1 310,1260 337,1287 v1(337,1500)
NetR9_2: R9.2 S1.2 | length 1740.7
  Internal Layer 2 w10: v1(725,909) 1414,1598 v1(1414,1748)
  Bottom Layer w10: S1.2 710,443.23 725,458.23 v1(725,909) ; v1(1414,1748) 1414,1700 R9.2
NetR10_2: R10.2 S2.2 | length 1608.2
  Internal Layer 2 w10: v1(1110,550) 1110,660 1615,1165 v1(1615,1594)
  Bottom Layer w10: v1(1110,550) 1110,443.23 S2.2 ; R10.2 1429.37,1598 1611,1598 v1(1615,1594)
P0_0: C6.2 R7.1 R8.2 U1.6 | length 310.6
  Top Layer w10: R7.1 v1(1140.63,1553.62) R8.2 C6.2
  Bottom Layer w10: U1.6 v1(1140.63,1553.62)
P0_1: C7.2 U1.5 VR1.2 | length 1122.9
  Top Layer w10: VR1.2 250,1392.6 252.6,1390 C7.2 420.63,1350 440.63,1330 531,1330 v1(779,1578)
  Bottom Layer w10: v1(779,1578) 790.05,1589.05 U1.5
P0_2: R9.1 U1.4 | length 331.9
  Bottom Layer w10: U1.4 1182.49,1624.49 1258,1700 R9.1
P0_3: R10.1 U1.8 | length 405.8
  Bottom Layer w10: U1.8 1330,1482.76 1350.63,1503.39 R10.1
P0_4: U1.9
P0_5: U1.10
P0_6: R13.1 T1.3 U1.11 | length 1332.7
  Bottom Layer w10: U1.11 1190,1376.46 1240,1326.46 1240,1010 1440,810 1556.5,810 1570,796.5 R13.1 1529,740 1529,498 1508.82,477.82 T1.3
P0_7: U1.12
P1_2: R4.1 U1.30 | length 304.3
  Top Layer w10: v1(452.06,1665) 476,1688.94 476,1720 R4.1
  Bottom Layer w10: v1(452.06,1665) 452.06,1555 492,1515.06 U1.30
P1_3: R5.1 U1.29 | length 276.4
  Top Layer w10: v1(421,1553) 482.37,1553 499.37,1570 R5.1
  Bottom Layer w10: v1(421,1553) 494.37,1479.63 U1.29
P1_4: R6.1 U1.28 | length 125.4
  Top Layer w10: v1(480,1444.19) 499.37,1463.56 R6.1
  Bottom Layer w10: v1(480,1444.19) U1.28
P1_5: U1.27
P1_6: U1.17
P2_0: U1.19
P2_1/PROG_DD: J1.4 U1.20 | length 1189.9
  Top Layer w10: J1.4 1573,1600 1583,1590 v1(1583,1373)
  Internal Layer 1 w10: v1(792.91,1373) v1(1583,1373)
  Bottom Layer w10: U1.20 742.91,1323 v1(792.91,1373)
P2_2/PROG_DC: J1.3 U1.21 | length 898.2
  Top Layer w10: v1(1219,1555) 1234,1570 1257,1570 1277,1590 1331,1590 1331,1600 J1.3
  Internal Layer 1 w10: v1(752.48,1488) 1167,1488 1219,1540 v1(1219,1555)
  Bottom Layer w10: U1.21 707.48,1443 v1(752.48,1488)
RESET: J1.7 U1.7 | length 320.5
  Top Layer w10: v1(1293.81,1518.19) 1312,1500 J1.7
  Bottom Layer w10: U1.7 v1(1293.81,1518.19)
SCL: R14.2 T2.2 U1.24 | length 1071.9
  Bottom Layer w10: T2.2 152.79,732.79 238,818 238,903.82 409.37,1075.19 ; R14.2 409.37,1075.19 ; U1.24 601.18,1267 430,1267 409.37,1246.37 409.37,1075.19
SDA: R15.2 T2.1 U1.25 | length 1370
  Internal Layer 2 w10: v1(518,770) 518,1281 v1(601,1364)
  Bottom Layer w10: T2.1 178.39,700 349.53,700 350,699.53 369,699.53 369,620 390,599 436,599 460,623 460,689 409.37,739.63 R15.2 v1(518,770) ; U1.25 581.89,1337.89 601,1357 v1(601,1364)
VDD: BT1.2 C1.2 C2.2 C5.1 C8.2 C11.2 J1.2 R7.2 R14.1 R15.1 T2.8 U1.13 U1.23 VR1.3 VR2.3 | length 5862.1
  Top Layer w10: VR1.3 30,1413.66 30,1040 70,1000 BT1.2 ; v1(140,790) BT1.2 ; v1@150,790 140,780 140,630 240,530 C5.1 ; v1(493,1000) BT1.2 ; v1(1180,880) 1180,1279 v1(1185,1284) 1219.37,1318.37 R7.2 ; R7.2@1220,1490 1300,1410 1365.76,1410 1390,1385.76 1390,1290 1410,1270 1470,1270 1490,1290 1490,1395 1460,1425 1460,1640 1470,1650 J1.2
  Bottom Layer w10: v1(140,790) 140,791.61 178.39,830 T2.8 ; R14.1 330.63,850 ; C11.2 409.37,710.63 400,720 364.37,720 330.63,753.74 R15.1 330.63,850 ; U1.23 636.61,1227.98 610.63,1202 C2.2 C2.2@610.63,1136.37 ; v1(1180,880) 1180,849.37 1110.63,780 C8.2 1160.63,800 1230,800 1240,790 1240,710 1220,690 1165,690 1150,675 1150,544 1164,530 1288.86,530 VR2.3 ; v1(1185,1284) 990.94,1284 U1.13 990.94,1123.94 957,1090 657,1090 C2.2@610.63,1136.37 ; 330.63,850 350.63,830 480,830 493,843 v1(493,1000) 493,1113 516.37,1136.37 C2.2@610.63,1136.37
pads on no net: J1.5 J1.6 J1.8 J1.9 J1.10 T1.1 T1.2 T2.3 U1.26
copper on no net: | length 800
  Top Layer w5: 1350,50 1400,50 1400,100 1350,100 1350,50
  Internal Layer 2 w5: 1450,50 1450,100 1500,100 1500,50 1450,50
  Internal Layer 1 w5: 1400,50 1450,50 1450,100 1400,100 1400,50
  Bottom Layer w5: 1500,50 1550,50 1550,100 1500,100 1500,50

## Polygon pours and split planes (outlines as drawn)
no net on Internal Layer 2 "GND" (solid, pour order 2): 20,1780 1630,1780 1630,20 20,20
no net on Internal Layer 1 "VDD" (solid, pour order 3): 20,1780 1630,1780 1630,20 20,20

## Keep-outs
Keep-Out Layer:
  the board outline again, w10

## Other copper
Top Layer:
  text "1" at 1370,110 h20
  text "R1" at 1360,60 h20
Internal Layer 2:
  pour cut-out: 1340,40 1560,40 1560,140 1340,140
  text "3" at 1480,110 h20
  text "R1" at 1490,60 h20
Internal Layer 1:
  pour cut-out: 1340,40 1560,40 1560,140 1340,140
  text "2" at 1420,110 h20
  text "R1" at 1410,60 h20
Bottom Layer:
  text "4" at 1540,110 h20
  text "R1" at 1540,60 h20

## Silkscreen, mask and mechanical layers (free items; w line width, h text height)
Top Overlay:
  drawing of 449 lines, arcs and shapes, not listed
  text "+3.3V" at 60,1550 h30
  text "PN:1107-PCB-01" at 640,1530 h20
  text "SN:" at 640,1480 h20
  text "GND" at 1490,780 h30
  text "GND" at 100,240 h30
Bottom Overlay:
  text "+3.3V" at 380,1640 h30
  text "GND" at 1410,920 h30
  text "GND" at 180,240 h30
Top Solder:
  rectangle: 1340,40 1560,140
Bottom Solder:
  rectangle: 1340,40 1560,140
Mechanical 13:
  drawing of 795 lines, arcs and shapes, not listed
  text "1" at -1598.66,6425 h70
  text "2" at 1152,6425 h70
  text "3" at 3897,6425 h70
  text "4" at 6648.01,6425 h70
  text "A" at -2875,5407 h70
  text "A" at 7925,5407 h70
  text "Material Construction and Stackup (overall finish: 0.062 +/- 0.005:" at 3150,3860 h60
  text "Layer" at 3200.38,3510 h60
  text "Name" at 3610.29,3510 h60
  text "Material" at 4660,3510 h60
  text "Thickness" at 5519.76,3510 h60
  text "Constant" at 6169.6,3510 h60
  text "Board Layer Stack" at 6739.46,3510 h60
  text "1" at 3200.38,3390 h60
  text "Top Overlay" at 3610.29,3390 h60
  text "B" at -2875,3282 h70
  text "B" at 7925,3282 h70
  text "2" at 3200.38,3270 h60
  text "Top Solder" at 3610.29,3270 h60
  text "Solder Resist" at 4660,3270 h60
  text "0.40mil" at 5519.76,3270 h60
  text "3.5" at 6169.6,3270 h60
  text "3" at 3200.38,3150 h60
  text "Top Layer" at 3610.29,3150 h60
  text "Copper" at 4660,3150 h60
  text "1.42mil" at 5519.76,3150 h60
  text "4" at 3200.38,3030 h60
  text "Dielectric 1" at 3610.29,3030 h60
  text "FR-4" at 4660,3030 h60
  text "10.00mil" at 5519.76,3030 h60
  text "4.2" at 6169.6,3030 h60
  text "5" at 3200.38,2910 h60
  text "Internal Layer 1" at 3610.29,2910 h60
  text "Copper" at 4660,2910 h60
  text "1.42mil" at 5519.76,2910 h60
  text "6" at 3200.38,2790 h60
  text "Dielectric 5" at 3610.29,2790 h60
  text "5.00mil" at 5519.76,2790 h60
  text "4.2" at 6169.6,2790 h60
  text "7" at 3200.38,2670 h60
  text "Internal Layer 2" at 3610.29,2670 h60
  text "Copper" at 4660,2670 h60
  text "1.42mil" at 5519.76,2670 h60
  text "8" at 3200.38,2550 h60
  text "Dielectric 4" at 3610.29,2550 h60
  text "10.00mil" at 5519.76,2550 h60
  text "4.2" at 6169.6,2550 h60
  text "9" at 3200.38,2430 h60
  text "Bottom Layer" at 3610.29,2430 h60
  text "Copper" at 4660,2430 h60
  text "1.42mil" at 5519.76,2430 h60
  text "10" at 3200.38,2310 h60
  text "Bottom Solder" at 3610.29,2310 h60
  text "Solder Resist" at 4660,2310 h60
  text "0.40mil" at 5519.76,2310 h60
  text "3.5" at 6169.6,2310 h60
  text "11" at 3200.38,2190 h60
  text "Bottom Overlay" at 3610.29,2190 h60
  text "Hole Schedule:" at 3120,1570 h60
  text "C" at -2875,1157 h70
  text "C" at 7925,1157 h70
  text "1800 (mil)" at 1685.99,624.08 h60 r90
  text "1650 (mil)" at 559.08,-35.99 h60
  text "ENGINEER:" at 3400,-640 h45
  text "TITLE:" at 4900,-640 h45
  text "Amir Yousefi" at 3590,-760 h70
  text "On Off Sensor Light" at 5090,-870 h70
  text "PCB DESIGNER:" at 3400,-935 h45
  text "D" at -2875,-963 h70
  text "D" at 7925,-963 h70
  text "Proprietary and confidential. The information contained" at 1960,-1210 h35
  text "DATE:" at 3400,-1240 h45
  text "PART NO.:" at 4900,-1240 h45
  text "REV:" at 7000,-1240 h45
  text "in this drawing is the sole property of AYSS Technology." at 1960,-1280 h35
  text "Any production in part or as a whole without the written" at 1960,-1350 h35
  text "1107-PCB-01" at 5260,-1350 h70
  text "01" at 7150,-1350 h70
  text "March 09, 2017" at 3450,-1360 h70
  text "permission of AYSS Technology is prohibited." at 1960,-1410 h35
  text "Dimensions are in inches unless otherwise specified" at 1960,-1490 h35
  text "FILE NAME:" at 3400,-1540 h45
  text "PAPER SIZE:" at 4900,-1540 h45
  text "SCALE:" at 7000,-1540 h45
  text "Tolerance: .XXX +/-0.005" at 1960,-1550 h35
  text ".XX  +/-0.01" at 2220,-1610 h35
  text "1107-PCB-01-R1" at 3450,-1660 h70
  text "1:1" at 7170,-1660 h70
  text "1" at -1598.66,-1875 h70
  text "2" at 1152,-1875 h70
  text "3" at 3897,-1875 h70
  text "4" at 6648.01,-1875 h70
Drill Drawing:
  lines w10: 3177.29,672.5 3243.96,672.5 3243.96,739.17 3177.29,739.17 3177.29,672.5 ; 3177.29,855.83 3210.62,822.5 3243.96,855.83 3210.62,889.17 3177.29,855.83 ; 3177.29,972.5 3177.29,989.17 3193.96,1005.83 3177.29,1022.5 3177.29,1039.17 3193.96,1039.17 3210.62,1022.5 3227.29,1039.17 3243.96,1039.17 3243.96,1022.5 3227.29,1005.83 3243.96,989.17 3243.96,972.5 3227.29,972.5 3210.62,989.17 3193.96,972.5 3177.29,972.5
  lines w15: 3117.5,627.5 6996.47,627.5 ; 3117.5,1077.5 6996.47,1077.5 ; 3668.38,477.5 3668.38,1227.5 ; 4366.19,477.5 4366.19,1227.5 ; 5711.79,477.5 5711.79,1227.5 ; 6217.67,477.5 6217.67,1227.5 ; 3117.5,477.5 6996.47,477.5 6996.47,1227.5 3117.5,1227.5 3117.5,477.5
  text "Symbol" at 3207.5,1122.5 h72
  text "Hit Count" at 3713.38,1122.5 h72
  text "Finished Hole Size" at 4411.19,1122.5 h72
  text "Plated" at 5756.79,1122.5 h72
  text "Hole Type" at 6262.67,1122.5 h72
  text "2" at 3713.38,972.5 h60
  text "35.43mil" at 4411.19,972.5 h60
  text "PTH" at 5756.79,972.5 h60
  text "Round" at 6262.67,972.5 h60
  text "3" at 3713.38,822.5 h60
  text "120.00mil" at 4411.19,822.5 h60
  text "PTH" at 5756.79,822.5 h60
  text "Round" at 6262.67,822.5 h60
  text "25" at 3713.38,672.5 h60
  text "15.60mil" at 4411.19,672.5 h60
  text "PTH" at 5756.79,672.5 h60
  text "Round" at 6262.67,672.5 h60
  text "30 Total" at 3713.38,522.5 h60

## Text inside footprints (layer, text, board x,y; h text height)
J1: Top Overlay "2." at 1589,1698 h39.37 r90; Top Overlay "1." at 1324,1704 h39.37 r90; Top Overlay "10." at 1588,1349 h39.37 r90; Top Overlay "9." at 1332,1363 h39.37 r90